# Altium PCB d_amp.PcbDoc
Units mil, origin at the board's own origin, x right, y up, seen from the top; angles counter-clockwise.
Board outline 2035 x 1320 mil, 2 copper layers (Top Layer, Bottom Layer); 33 components, 19 nets, 94 pads, 63 vias.
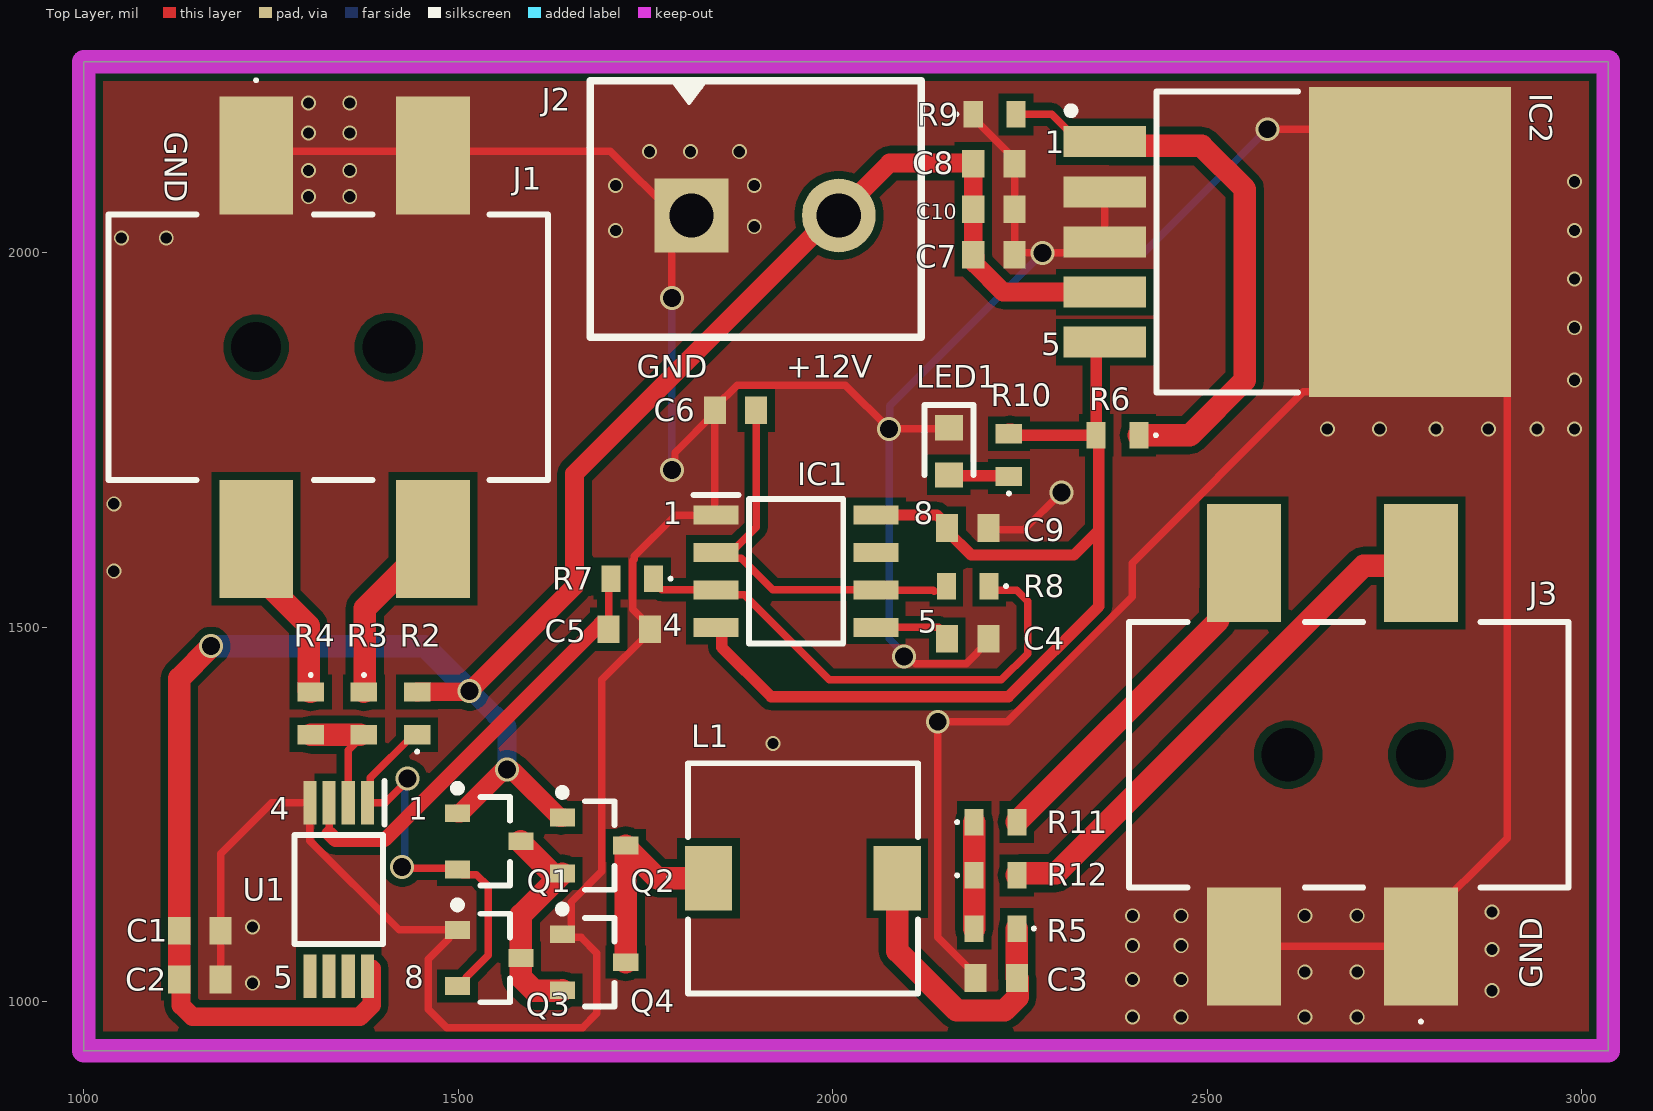
[diagram p0: Top Layer view]
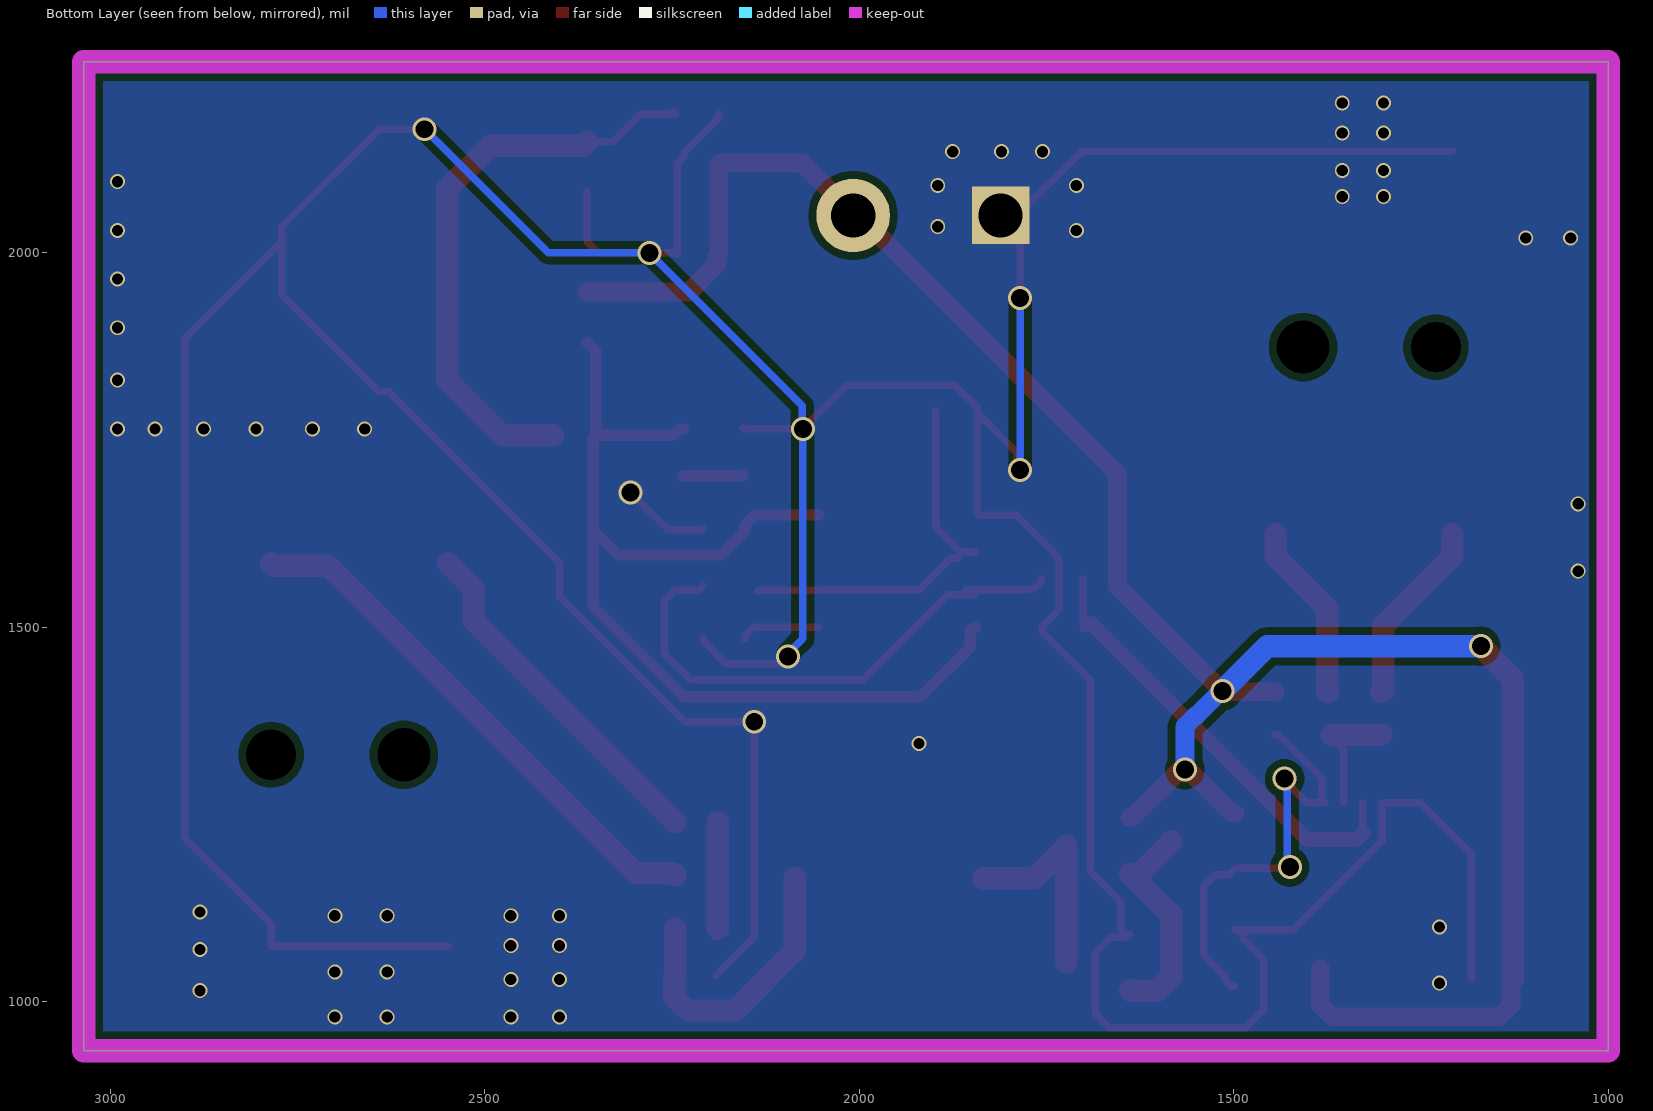
[diagram p1: Bottom Layer view, seen from below]
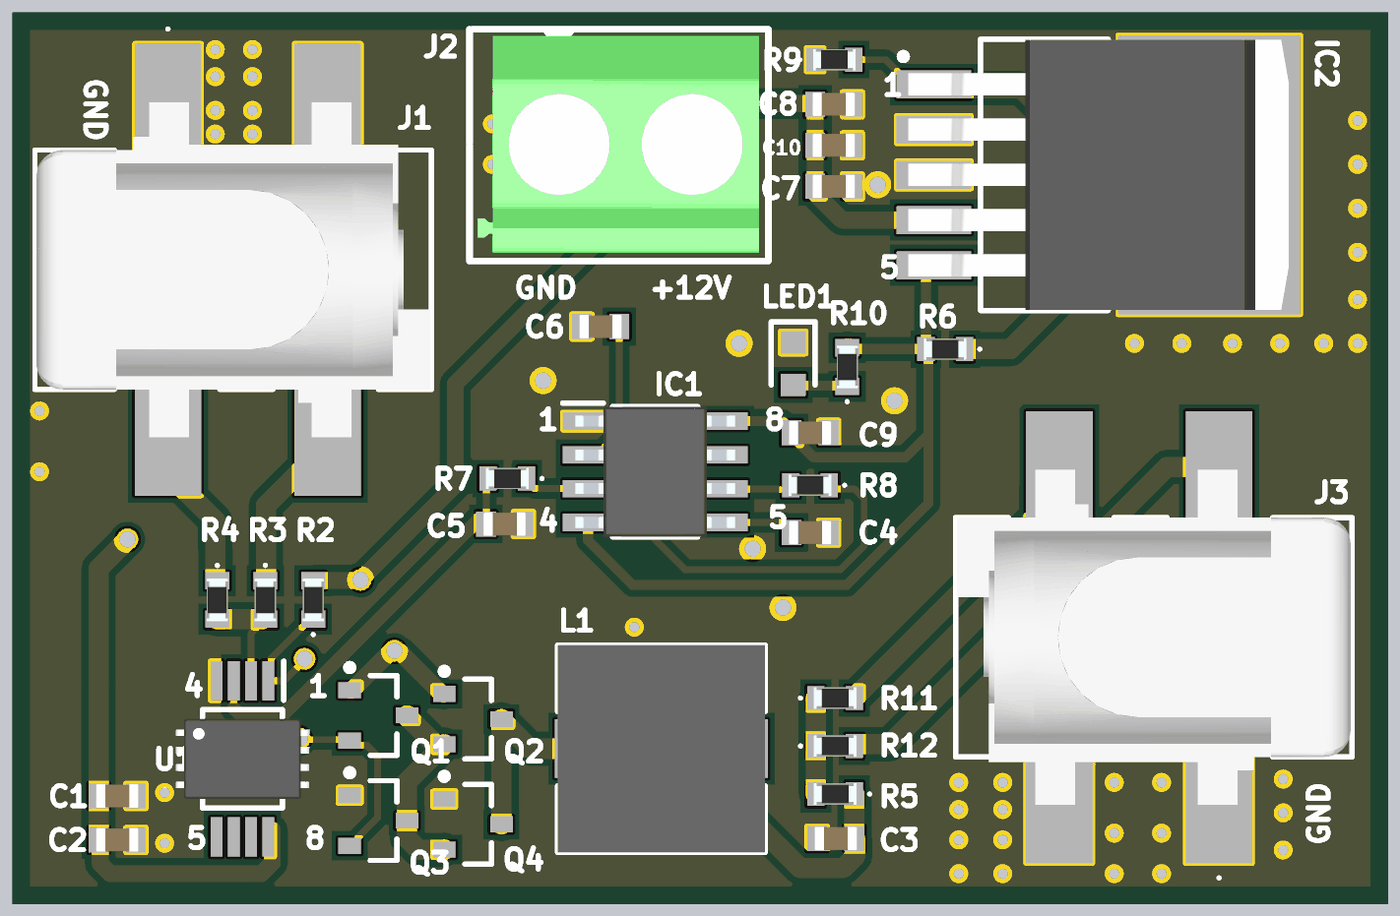
[diagram p2: 3D render of the assembled board from above, using the file's embedded part models]

## Layer stack, top to bottom
Top Solder: solder mask 0.4, Solder Resist, Dk 3.5
Top Layer: signal copper 1.4
Dielectric 1: dielectric 12.6, FR-4, Dk 4.8
Bottom Layer: signal copper 1.4
Bottom Solder: solder mask 0.4, Solder Resist, Dk 3.5

## Board outline
1000,935 3035,935 3035,2255 1000,2255

## Design rules (kind name [scope] priority, off if disabled: settings)
Clearance [All] p1: gap=10 ignorepadtopadclearanceinfootprint=FALSE except(0: Arc-Hole Track-Hole SMDPad-Hole THPad-Hole Via-Hole Fill-Hole Poly-Hole Region-Hole Text-Hole; 6: SMDPad-SMDPad)
PlaneConnect [All] p1: planeconnectstyle=Direct reliefexpansion=20 reliefentries=4 reliefconductorwidth=10 reliefairgap=10
PolygonConnect [All] p1: connectstyle=Direct reliefconductorwidth=10 reliefentries=4 polygonreliefangle="90 Angle" airgapwidth=10
RoutingVias [All] p1: holewidth=24 width=32 viastyle="Through Hole" minholewidth=15 minwidth=10 maxholewidth=32 maxwidth=50
SolderMaskExpansion [All] p1: expansion=4 istentingtop=FALSE
Width [All] p1: maxlimit=70 minlimit=8 preferedwidth=10 minimp=50.000000 maximp=50.000000 favimp=50.000000
29 further rules are at their usual default settings.

## Classes and differential pairs
component class "power section": C7 C8 C9 C10 IC2 J2 J3 LED1 R6 R9 R10 R11 R12
component class class_D_amplifier: 3 C1 C2 C3 C4 C5 C6 IC1 IC? J1 L1 Q1 Q2 Q3 Q4 R3 R4 R5 R7 R? U1 U?

## Components (designator, comment, footprint, x,y, rotation, side; value= is the part's Value field where it differs from the comment)
C1 "100nF" CAPC1608X90N 1155,1095 r180 top
C2 "100nF" CAPC1608X90N 1155,1030 r180 top
C3 "100nF" CAPC1608X90N 2218.04,1032.02 r0 top (schematic designator C4)
C4 "100nF" CAPC1608X90N 2180,1485 r180 top (schematic designator C5)
C5 "0.2uF" CAPC1608X90N 1728.14,1497.54 r180 top (schematic designator C?)
C6 "0.1uF" CAPC1608X90N 1870,1790 r0 top
C7 "4.7uF" CAPC1608X90N 2215,1997.49 r180 top
C8 "4.7uF" CAPC1608X90N 2215,2119.08 r180 top
C9 "22uF" CAPC1608X90N 2180,1632.67 r180 top
C10 "470nF" CAPC1608X90N 2215,2058.29 r180 top
IC1 "NE555DR" SOIC127P600X175-8N 1950.81,1575 r0 top
IC2 "LM2941CS_NOPB" TO170P1435X465-6N 2607.31,2014.55 r0 top
J1 "PJ-002AH-SMT-TR" PJ002AHSMTTR 1326.46,1874.09 r270 top
J2 "" CON2_P196_1729128_TH_ST 1811.11,2050 r0 top
J3 "PJ-002AH-SMT-TR" PJ002AHSMTTR 2688.54,1330 r90 top
L1 "100uH" IFDC3030EZER101M 1960,1165 r0 top
LED1 "FKR1111C-TR" LEDC1608X80N 2155,1735 r270 top
Q1 "NPN" SOT-23B_L 1541.16,1214.28 r0 top
Q2 "NPN" SOT-23B_L 1681.09,1208.77 r0 top
Q3 "PNP" SOT-23B_L 1541.16,1058.6 r0 top
Q4 "PNP" SOT-23B_L 1681.09,1053.09 r0 top
R2 "3k" ERA3AEB101V 1445,1385.22 r90 top (schematic designator R3)
R3 "10K" ERA3AEB101V 1373.97,1385.22 r270 top (schematic designator R4)
R4 "10K" ERA3AEB101V 1302.93,1385.22 r270 top (schematic designator R5)
R5 "100" ERA3AEB101V 2217.06,1097.93 r180 top (schematic designator R7)
R6 "10k" ERA3AEB101V 2380,1756.51 r180 top
R7 "100k" ERA3AEB101V 1732.14,1565 r180 top (schematic designator R8)
R8 "47K" ERA3AEB101V 2180,1555 r180 top
R9 "10k" ERA3AEB101V 2215.98,2185 r0 top
R10 "1k" ERA3AEB101V 2235,1730 r90 top
R11 "10k" ERA3AEB101V 2217.06,1240 r0 top
R12 "10k" ERA3AEB101V 2217.06,1168.97 r0 top
U1 "LM393" SOP65P640X120-8N 1340.21,1150 r270 top

## Footprints (in the part's own frame and the unit in brackets; to place one, negate y for a bottom-side part, rotate by r counter-clockwise, add the part's x,y. Pads: shape width x height; smd on the part's side, far side on the other; paste and mask are expansions set on the pad)
CAPC1608X90N [mm]
  rect 0.75x0.94 smd: 1(-0.7,0) 2(0.7,0)
  body extent -0.8,-0.45 0.8,0.45, height 0.8
CON2_P196_1729128_TH_ST [mm]
  rect 2.5x2.5 / inner round 1.95 / far side rect 1.95x1.95 hole 1.5: 1(0,0)
  round 2.5 hole 1.5: 2(5,0)
  silkscreen extent -3.43,-4.14 7.8,4.57, body extent -3.13,-3.83 7.44,4.32, height 10.51
ERA3AEB101V [mm]
  rect 0.65x0.9 smd: 1(-0.725,0) 2(0.725,0)
  silkscreen extent -1.35,-0.05 -1.25,0.05, body extent -0.8,-0.4 0.8,0.4, height 0.45
IFDC3030EZER101M [mm]
  rect 1.6x2.2 smd: 1(-3.2,0) 2(3.2,0)
  silkscreen extent -4.6,-3.9 3.9,3.9, body extent -3.9,-3.9 3.9,3.9, height 5.1
LEDC1608X80N [mm]
  rect 0.85x0.95 smd: 1(-0.8,0) 2(0.8,0)
  silkscreen extent -1.58,-0.82 0.8,0.82
PJ002AHSMTTR [mm]
  rect 4x2.5 smd: 1(-6.5,-2.45) 2(6.5,-2.45) 3(6.5,3.55) A1(-6.5,3.55)
  round 0.85 hole 1.7 unplated: MH1(0,-2.45)
  round 0.9 hole 1.8 unplated: MH2(0,2.05)
  silkscreen extent -9.1,-7.45 4.5,7.45, body extent -6.3,-7.4 6.3,7.4, height 11.2
SOIC127P600X175-8N [mm]
  rect 1.525x0.65 smd: 1(-2.712,1.905) 2(-2.712,0.635) 3(-2.712,-0.635) 4(-2.712,-1.905) 5(2.712,-1.905) 6(2.712,-0.635) 7(2.712,0.635) 8(2.712,1.905)
  silkscreen extent -3.47,-2.45 1.6,2.58, body extent -3,-2.45 3,2.45, height 1.75
SOP65P640X120-8N [mm]
  rect 1.475x0.45 smd: 1(-2.938,0.975) 2(-2.938,0.325) 3(-2.938,-0.325) 4(-2.938,-0.975) 5(2.938,-0.975) 6(2.938,-0.325) 7(2.938,0.325) 8(2.938,0.975)
  silkscreen extent -3.67,-1.5 1.85,1.55, body extent -1.5,-3.2 1.5,3.2, height 0.55
SOT-23B_L [mm] "SOT23, 3-Leads, Body 2.9x1.3mm, Pitch 0.95mm, Lead Span 2.4mm, IPC High Density"
  rect 0.85x0.6 smd: 1(-1.075,0.95) 2(-1.075,-0.95) 3(1.075,0)
  silkscreen extent -1.2,-1.5 0.7,1.92, body extent -0.7,-1.5 0.7,1.5, height 1.14
TO170P1435X465-6N [mm]
  rect 2.8x1.05 smd: 1(-6.2,3.4) 2(-6.2,1.7) 3(-6.2,0) 4(-6.2,-1.7) 5(-6.2,-3.4)
  rect 6.85x10.5 smd: 6(4.15,0)
  silkscreen extent -7.47,-5.1 0.35,5.1, body extent -7.16,-5.08 7.14,5.08, height 4.72

## Part data
C1 C2 C3 C4 C5 C6 C7 C8 C9 C10: library part GRM188R71C104MA01D, "Capacitor", Manufacturer_Name="Murata Electronics", Mouser Part Number=81-GRM18R71C104MA01D, Arrow Part Number=GRM188R71C104MA01D, Arrow Price/Stock=https://www.arrow.com/en/products/grm188r71c104ma01d/murata-manufacturing, Datasheet Link=http://componentsearchengine.com/Datasheets/1/GRM188R71C104MA01D.pdf, Height=0.9mm, Manufacturer_Part_Number=GRM188R71C104MA01D, Mouser Price/Stock=https://www.mouser.com/Search/Refine.aspx?Keyword=81-GRM18R71C104MA01D
IC1: "Integrated Circuit", Manufacturer_Name="Texas Instruments", Mouser Part Number=595-NE555DR, RS Part Number=1218414, Datasheet Link=http://www.ti.com/lit/ds/symlink/ne555.pdf, Height=1.75mm, Manufacturer_Part_Number=NE555DR, Mouser Price/Stock=https://www.mouser.com/Search/Refine.aspx?Keyword=595-NE555DR, RS Price/Stock=http://uk.rs-online.com/web/p/products/1218414
IC2: "Integrated Circuit", Arrow Part Number=LM2941CS/NOPB, Manufacturer_Name="Texas Instruments", Mouser Part Number=926-LM2941CS/NOPB, Arrow Price/Stock=https://www.arrow.com/en/products/lm2941csnopb/texas-instruments?utm_currency=USD&region=europe, Datasheet Link=http://www.ti.com/lit/ds/symlink/lm2941c.pdf, Height=4.65mm, Manufacturer_Part_Number=LM2941CS/NOPB, Mouser Price/Stock=https://www.mouser.co.uk/ProductDetail/Texas-Instruments/LM2941CS-NOPB?qs=X1J7HmVL2ZH2r4C4M%252B7C2A%3D%3D
J1 J3: "Connector", Manufacturer_Name="Same Sky", Mouser Part Number=490-PJ-002AH-SMT-TR, Arrow Part Number=PJ-002AH-SMT-TR, Arrow Price/Stock=https://www.arrow.com/en/products/pj-002ah-smt-tr/cui-devices?utm_currency=USD&region=europe, Datasheet Link=https://www.sameskydevices.com/product/resource/supplyframepdf/pj-002ah-smt-tr.pdf, Height=11.1mm, Manufacturer_Part_Number=PJ-002AH-SMT-TR, Mouser Price/Stock=https://www.mouser.co.uk/ProductDetail/Same-Sky/PJ-002AH-SMT-TR?qs=WyjlAZoYn52i5LSWfoFS9w%3D%3D
J2: library part CON-TB_2X1-196-ST-TH, "2 Pins, 1 Row 5mm Pitch, straight Connector, male", Alternate Part Number-1=NA, Case/Package=TH-CON, Manufacturer="Phoenix Contact", Manufacturer Part Number=MKDSN1,5/2, Supplier Part Number-1=MKDSN1,5/2, Supplier-1="SP ROAD"
L1: library part IFDC3030EZER101M, "Inductor", Manufacturer_Name=Vishay, Mouser Part Number=70-IFDC3030EZER101M, Datasheet Link=https://www.vishay.com/docs/34634/ifdc3030ez.pdf, Height=5mm, Manufacturer_Part_Number=IFDC3030EZER101M, Mouser Price/Stock=https://www.mouser.co.uk/ProductDetail/Vishay-Dale/IFDC3030EZER101M?qs=iLKYxzqNS76MdVQy6oVcaA%3D%3D
LED1: "LED", Manufacturer_Name="Stanley Electric", Mouser Part Number=327-FKR1111CTR, Arrow Part Number=FKR1111C-TR, Arrow Price/Stock=https://www.arrow.com/en/products/fkr1111c-tr/stanley-electric?region=nac, Datasheet Link=http://www.stanley-components.com/php/downloaddatafile.php?rp=0,FKR1111C-TR_e.pdf, Height=0.8mm, Manufacturer_Part_Number=FKR1111C-TR, Mouser Price/Stock=https://www.mouser.co.uk/ProductDetail/Stanley-Electric/FKR1111C-TR?qs=byeeYqUIh0N4LNttpqKOoA%3D%3D
Q1 Q2: library part QNPN, "NPN Bipolar Transistor", LatestRevisionDate=29-May-2009, LatestRevisionNote="IPC-7351 Footprint Added.", PackageDescription="3-Pin SOT-23 Package 0.95 mm Pitch, 2.4 mm Lead Span", PackageReference=SOT-23B, PackageVersion=Aug-1999, Published=8-Jun-2000, Publisher="Altium Limited"
Q3 Q4: "PNP Bipolar Transistor", LatestRevisionDate=29-May-2009, LatestRevisionNote="IPC-7351 Footprint Added.", PackageDescription="3-Pin SOT-23 Package 0.95 mm Pitch, 2.4 mm Lead Span", PackageReference=SOT-23B, PackageVersion=Aug-1999, Published=8-Jun-2000, Publisher="Altium Limited"
R2 R3 R4 R5 R6 R7 R8 R9 R10 R11 R12: library part ERA-3AED102V, "Resistor", Manufacturer_Name=Panasonic, Mouser Part Number=667-ERA-3AED102V, Arrow Part Number=ERA-3AED102V, Arrow Price/Stock=https://www.arrow.com/en/products/era3aed102v/panasonic?region=nac, Datasheet Link=https://industrial.panasonic.com/cdbs/www-data/pdf/RDM0000/AOA0000C307.pdf, Height=0.55mm, Manufacturer_Part_Number=ERA-3AED102V, Mouser Price/Stock=https://www.mouser.co.uk/ProductDetail/Panasonic/ERA-3AED102V?qs=yocZuyCaXdNrh6oeFjCchg%3D%3D
U1: library part IC_LM339M/NOPB, "Comparator General Purpose CMOS, DTL, ECL, MOS, Open-Collector, TTL 14-SOIC", Alternate Part Number-1=NA, Case/Package=SOIC14, Manufacturer="TI National Semiconductor", Manufacturer Part Number=LM339M/NOPB, Supplier Part Number-1=LM339M/NOPB, Supplier-1="RS COMP"

## Via types
v1: diameter 20, hole 15, Top Layer to Bottom Layer, 50 vias
v2: diameter 32, hole 24, Top Layer to Bottom Layer, 13 vias

## Nets (pads, with @x,y where several pads share a name; then routed paths per layer and width w, separated by ;. In a path a pad name is that pad's centre, name@x,y a point inside that pad or via, vN(x,y) a via of type N, cw(c..) or ccw(c..) an arc to the next point about the centre after c; other vN are vias at no path point)
+5: C9.2 IC1.4 IC1.8 IC2.5 R6.2 R10.2 | length 1433.2
  Top Layer w15: IC1.4 1846.21,1500 1851.51,1494.7 1851.51,1473.49 1917.5,1407.5 2234.32,1407.5 2355,1528.18 2355,1630 ; IC1.8@2053.61,1650 2138.85,1650 2152.44,1636.41 C9.2 2152.44,1628.93 2184.7,1596.66 2321.66,1596.66 2355,1630 ; R10.2@2233.97,1764.97 2238.89,1764.97 2247.35,1756.51 R6.2 ; IC2.5 2351.46,1868.93 R6.2 ; R6.2 2355,1752.96 2355,1630
+12: C1.2 C2.2 C7.2 C8.2 C10.2 IC2.4 J2.2 Q1.1 Q2.1 R2.2 U1.8 | length 2957.3
  Top Layer w25: C2.2 1129.7,1027.74 1129.7,995.3 1145,980 1368.38,980 1384.36,995.98 U1.8@1384.36,1044.36 ; R2.2 1445.3,1414.06 1514.06,1414.06 v2(1515,1415) 1655,1555 1655,1705 1985.81,2035.81 1985.81,2050 2005.68,2050 2075.68,2120 2186.53,2120 C8.2 C10.2 C7.2 2189.7,1995.23 2189.7,1985.26 2227.34,1947.62 IC2.4 ; Q1.1 1502.38,1251.68 1559.36,1308.66 1563.66,1308.66 v2(1565,1310) 1566.34,1308.66 1572.74,1308.66 1635.23,1246.17 Q2.1
  Top Layer w30: C2.2 C1.2 1127.44,1431.9 1170,1474.46 v2(1170,1475)
  Bottom Layer w25: v2(1515,1415) 1516.89,1415 1549.58,1382.32 1550.36,1382.32 1565,1367.67 v2(1565,1310)
  Bottom Layer w30: v2(1170,1475) 1455,1475 v2(1515,1415)
"Audio out": R5.2 R11.1 R12.1 | length 142.1
  Top Layer w30: R5.2 R12.1 R11.1
GND: C1.1 C2.1 C3.1 C4.1 C5.1 C6.1 C7.1 C8.1 C9.1 C10.1 IC1.1 IC2.2 IC2.3 IC2.6 J1.1 J1.A1 J2.1 J3.1 J3.A1 LED1.1 Q3.1 Q4.1 R9.1 U1.4 | length 7850.2
  Top Layer w10: C2.1 C1.1 1182.56,1197.56 1250.67,1265.67 U1.4 1301.82,1215.32 1421.13,1096 Q3.1@1493.92,1096 ; J1.1@1207.84,2135.91 1444.06,2135.91 1703.05,2135.91 1788.96,2050 1785,2046.04 v2(1785,1940) ; Q3.1 Q3.1@1493.92,1096 ; Q4.1 1643.69,1090.49 1650.5,1097.3 1650.5,1133.34 1691.68,1174.52 1691.68,1429.78 1755.7,1493.8 1755.7,1501.28 1732.88,1524.09 1732.88,1588.93 1735,1591.05 1735,1595.01 1789.99,1650 IC1.1@1840.07,1650 ; Q4.1@1643.28,1085.98 1664.02,1085.98 1685,1065 1685,985 1665.75,965.75 1484.25,965.75 1460,990 1460,1057.17 1487.11,1084.27 1487.11,1089.19 Q3.1@1493.92,1096 ; v2(1785,1710) 1789.21,1714.21 1789.21,1733.03 C6.1@1842.44,1786.26 ; IC1.1@1842.44,1654.43 C6.1@1842.44,1786.26 ; 2110.46,1451.5 2177.8,1451.5 2207.56,1481.26 C4.1 ; LED1.1 2153.5,1765 v2(2075,1765) 2016.5,1823.5 1872.2,1823.5 1842.44,1793.74 C6.1 C6.1@1842.44,1786.26 ; R9.1 2187.44,2180.08 2232.8,2134.72 2232.8,2128.85 C8.1 C10.1 C7.1 2245.07,2000 v2(2280,2000) 2348.67,2000 IC2.3 IC2.2 ; C3.1@2190.48,1035.76 2140,1086.24 v2(2140,1374) 2232.64,1374 2399.6,1540.96 2399.6,1585.89 2628.1,1814.39 2640.85,1814.39 2770.69,1944.24 IC2.6 ; C9.1 2210.06,1630.16 2255.16,1630.16 v2(2305,1680) ; J3.A1 J3.1 2785,1103.62 2900,1218.62 2900,1885.24 IC2.6 ; v2(2580,2165) 2640.85,2165 2770.69,2035.16 IC2.6
  Bottom Layer w10: v2(1785,1710) v2(1785,1940) ; v2(2095,1461) 2095,1464.84 2075,1484.84 v2(2075,1765) 2076,1766 2076,1796 v2(2280,2000) 2415,2000 v2(2580,2165)
  other v1: 2400,980 2465,980 2630,980 2700,980 2880,1015 1225,1025 2400,1030 2465,1030 2630,1040 2700,1040 2880,1070 2400,1075 2465,1075 1225,1100 2400,1115 2465,1115 2630,1115 2700,1115 2880,1120 1920,1345 1040,1575 1040,1665 2660,1765 2730,1765 2805,1765 2875,1765 2940,1765 2990,1765 2990,1830 2990,1900 2990,1965 1050,2020 1110,2020 1710,2030 2990,2030 1895,2035 1300,2075 1355,2075 1710,2090 1895,2090 2990,2095 1300,2110 1355,2110 1755,2135 1810,2135 1875,2135 1300,2160 1355,2160 1300,2200 1355,2200
NetC3_2: C3.2 L1.2 R5.1 | length 390.3
  Top Layer w30: L1.2 2085.98,1067.89 2165.36,988.51 2229.1,988.51 2246.68,1006.09 2246.68,1030.94 C3.2 R5.1
NetC4_2: C4.2 IC1.5 | length 107.2
  Top Layer w10: IC1.5@2053.61,1500 2141.18,1500 2152.44,1488.74 C4.2
NetC5_2: C5.2 R7.2 U1.3 | length 607.6
  Top Layer w10: 1327.41,1225.08 U1.3 ; C5.2@1690,1505 1693.12,1505 C5.2 1701.02,1497.98 1701.02,1564.56 R7.2@1701.46,1565
  Top Layer w20: 1327.41,1225.08 1335.86,1216.63 1401.63,1216.63 C5.2@1690,1505
NetC6_2: C6.2 IC1.2 IC1.6 R8.2 | length 517.8
  Top Layer w10: IC1.2 1857.29,1600 IC1.2@1864.09,1600 ; C6.2 1897.56,1633.46 1867.05,1602.95 IC1.2@1864.09,1600 ; 2135,1548.54 2134.27,1549.27 2054.34,1549.27 2053.61,1550 1920,1550 1877.8,1592.2 1869.06,1592.2 1864.09,1597.17 IC1.2@1864.09,1600
NetIC1_3: IC1.3 R7.1 R8.1 | length 719.6
  Top Layer w10: R7.1@1756.71,1565 1756.71,1560.08 1764.51,1552.28 1769.43,1552.28 1771.71,1550 1840.07,1550 1846.6,1543.47 1881.53,1543.47 1995,1430 2225,1430 2260,1465 2260,1535 2245.48,1549.52 2214.02,1549.52 R8.1 ; IC1.3 IC1.3@1857.29,1550
NetIC2_1: IC2.1 R6.1 R9.2 | length 778.6
  Top Layer w10: R9.2@2247.93,2188.41 R9.2 2292.17,2185 2328.77,2148.41 IC2.1
  Top Layer w30: IC2.1 2368.88,2142.74 2492.26,2142.74 2550,2085 2550,1830 2476.51,1756.51 R6.1
NetJ1_2: J1.2 R4.1 | length 250
  Top Layer w30: J1.2@1207.84,1624.09 1207.84,1594.57 1300,1502.41 1300,1460 1300.22,1459.78 1300.22,1415.97 1302.42,1413.76 R4.1
NetJ1_3: J1.3 R3.1 | length 239.4
  Top Layer w30: R3.1 1375,1414.8 1375,1525.5 1444.06,1594.57 J1.3@1444.06,1624.09
NetJ3_2: J3.2 R12.2 | length 712.4
  Top Layer w30: R12.2 2245.6,1169.48 2247.81,1171.68 2297.86,1171.68 2708.36,1582.18 2781.27,1582.18 J3.2
NetJ3_3: J3.3 R11.2 | length 471.5
  Top Layer w30: R11.2 2245.6,1240.51 2514.57,1509.48 2514.57,1551.69 J3.3
NetL1_1: L1.1 Q2.3 Q4.3 | length 283.8
  Top Layer w30: Q4.3 Q2.3@1723.42,1207.31 ; Q2.3 Q2.3@1723.42,1207.31 ; L1.1 1765.73,1165 Q2.3@1723.42,1207.31
NetLED1_2: LED1.2 R10.1 | length 80.8
  Top Layer w15: LED1.2 2156.02,1702.48 2233.98,1702.48 R10.1
NetQ1_2: Q1.2 Q3.2 R2.1 U1.1 | length 589.3
  Top Layer w10: v2(1425,1180) 1426.56,1178.44 1497.28,1178.44 Q1.2 1505.65,1170.07 1524.07,1170.07 1540,1154.14 1540,1062.36 1510.57,1032.93 1510.57,1028.01 1503.76,1021.2 Q3.2 ; v2(1432.04,1297.96) 1432.04,1295.26 1402.45,1265.67 U1.1 1382.45,1269.53 1382.45,1299.05 1440.08,1356.68 R2.1
  Bottom Layer w10: v2(1425,1180) 1428.52,1183.52 1428.52,1294.43 v2(1432.04,1297.96)
NetQ1_3: Q1.3 Q2.2 Q3.3 Q4.2 | length 280.1
  Top Layer w30: Q1.3 1583.48,1212.83 1621.75,1174.56 ; Q4.2 1638.08,1015 1601.06,1015 1583.48,1032.57 Q3.3 1583.48,1116.08 Q2.2
NetR3_2: R3.2 R4.2 U1.2 | length 168.7
  Top Layer w10: U1.2 1353,1335.71 1361.25,1343.96 1361.25,1348.88 1369.04,1356.68 R3.2
  Top Layer w30: R4.2 R3.2@1369.04,1356.68
pads on no net: IC1.7 J1.MH1 J1.MH2 J3.MH1 J3.MH2 U1.5 U1.6 U1.7

## Polygon pours and split planes (outlines as drawn)
GND on Top Layer "GND_L01_P000" (solid, remove dead copper, pour order 0): 1000,935 3035,935 3035,2255 1000,2255
GND on Bottom Layer "GND_L02_P001" (solid, remove dead copper, pour order 1): 1000,935 3035,935 3035,2255 1000,2255

## Keep-outs
Keep-Out Layer:
  the board outline again, w31.5

## Silkscreen, mask and mechanical layers (free items; w line width, h text height)
Top Overlay:
  text "GND" at 1108,2162 h30 r270
  text "1" at 2283,2133 h30
  text "5" at 2278,1863 h30
  text "GND" at 1738,1833 h30
  text "+12V" at 1938,1833 h30
  text "1" at 1773,1638 h30
  text "8" at 2108,1638 h30
  text "5" at 2113,1493 h30
  text "4" at 1773,1488 h30
  text "4" at 1248,1243 h30
  text "1" at 1433,1243 h30
  text "5" at 1253,1018 h30
  text "8" at 1428,1018 h30
  text "GND" at 2947,1018 h30 r90